# Altium PCB LacewingPXE_v3p1.PcbDoc (part 2 of 2)
Units mm, origin at the board's own origin, x right, y up, seen from the top; angles counter-clockwise.
Board outline 62.74 x 108.59 mm, 2 copper layers (Top Layer, Bottom Layer); 89 components, 71 nets, 448 pads, 65 vias.
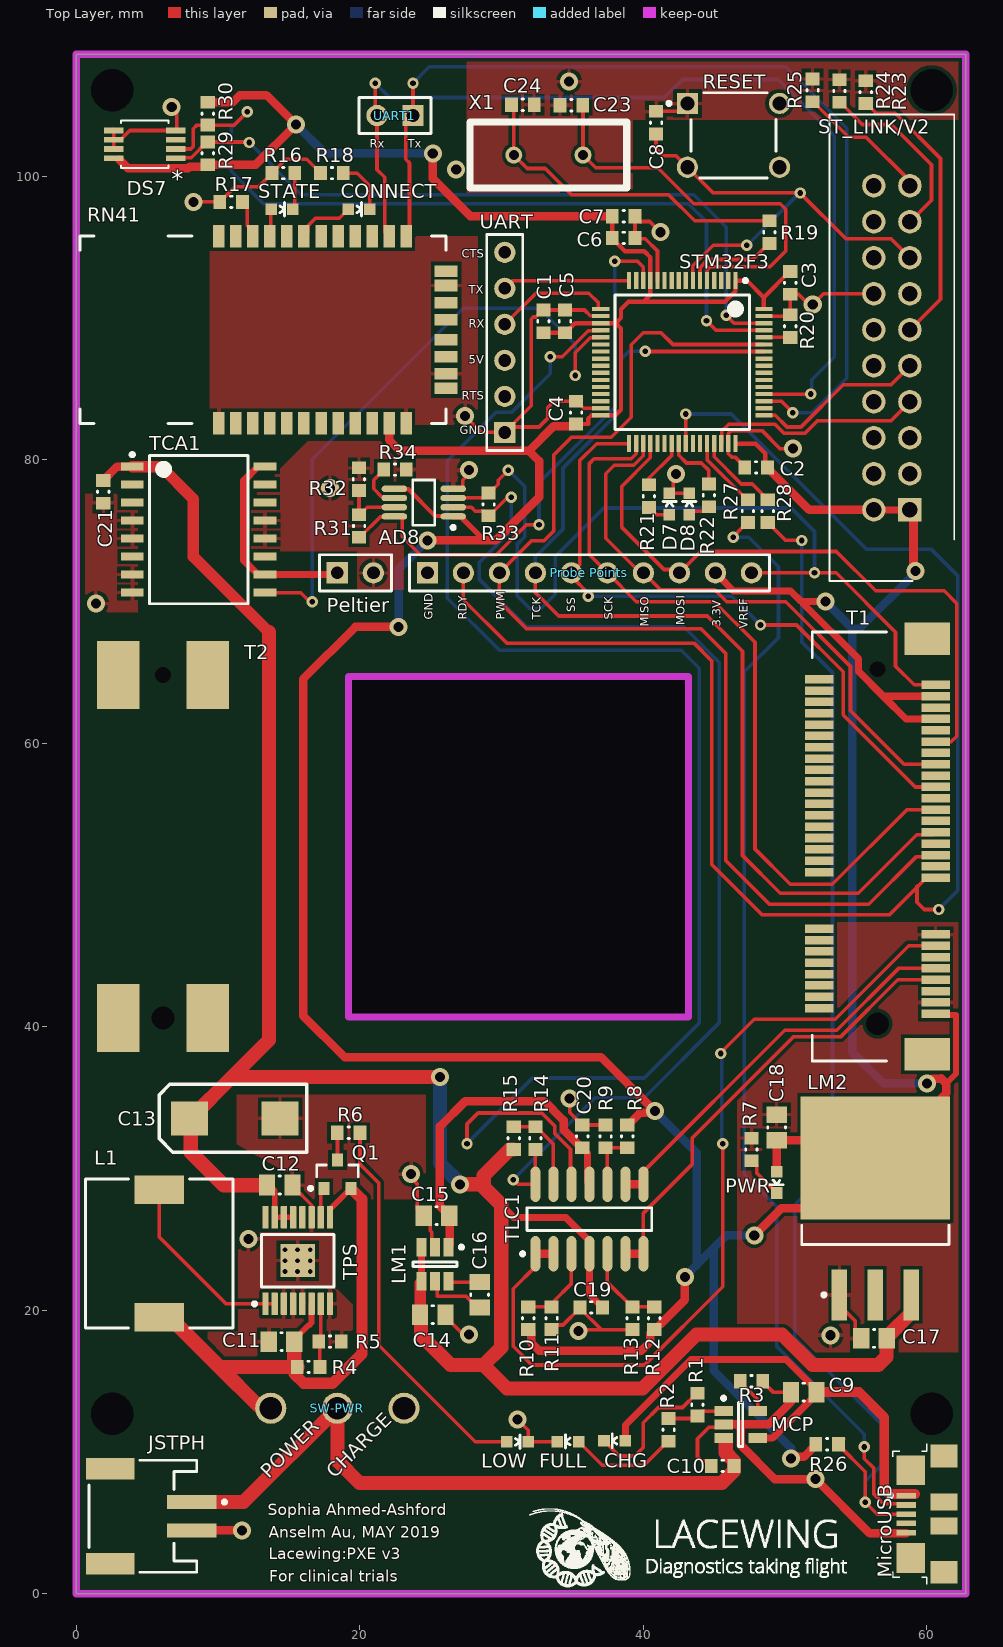
[diagram p0: Top Layer view]

## Polygon pours and split planes (outlines as drawn) (continued)
no net on Top Layer "Top Layer-No Net" (solid, pour order 40): 13.081,78.74
no net on Top Layer "Top Layer-No Net 1" (solid, pour order 30): 11.303,35.179
no net on Top Layer "Top Layer-No Net 2" (solid, pour order 16): 62.738,17.018
no net on Top Layer "Top Layer-No Net 3" (solid, pour order 4): 0,108.585
no net on Top Layer "Top Layer-No Net 4" (solid, pour order 2): -0.127,108.839

## Keep-outs
Keep-Out Layer:
  lines w0.5: 19.188,64.705 19.188,40.672 43.188,40.672 43.188,64.705 19.377,64.705 ; 0,0 62.738,0 62.738,108.585 0,108.585 0,0

## Silkscreen, mask and mechanical layers (free items; w line width, h text height)
Top Overlay:
  drawing of 6186 lines, arcs and shapes, not listed
  text "Tx" at 23.368,101.994 h0.6
  text "Rx" at 20.701,101.981 h0.6
  text "CTS" at 27.178,94.234 h0.6
  text "TX" at 27.686,91.694 h0.6
  text "RX" at 27.686,89.281 h0.6
  text "5V" at 27.686,86.741 h0.6
  text "RTS" at 27.178,84.201 h0.6
  text "GND" at 27.051,81.788 h0.6
  text "SS" at 35.179,69.215 h0.6 r90
  text "GND" at 25.146,68.707 h0.6 r90
  text "RDY" at 27.559,68.704 h0.6 r90
  text "PWM" at 30.226,68.707 h0.6 r90
  text "TCK" at 32.766,68.707 h0.6 r90
  text "SCK" at 37.846,68.707 h0.6 r90
  text "MOSI" at 42.926,68.326 h0.6 r90
  text "MISO" at 40.386,68.199 h0.6 r90
  text "3.3V" at 45.466,68.199 h0.6 r90
  text "VREF" at 47.371,68.072 h0.6 r90
  text "POWER" at 13.578,8.083 h1 r45
  text "CHARGE" at 18.247,8.083 h1 r45
  text "Sophia Ahmed-Ashford" at 13.497,5.532 h0.8
  text "Anselm Au, MAY 2019" at 13.587,3.937 h0.8
  text "Lacewing:PXE v3" at 13.587,2.413 h0.8
  text "For clinical trials" at 13.624,0.833 h0.8

## Text inside footprints (layer, text, board x,y; h text height)
DS7: Top Overlay "*" at 7.582,100.981 h1.27 r180; Mechanical 7 "Default Padstyle: RX54Y16D0T" at 13.716,108.864 h1.27 r180; Mechanical 7 "Pin One Padstyle: RX54Y16D0T" at 13.716,110.388 h1.27 r180; Mechanical 7 "Alt 1 Padstyle: OX60Y90D30P" at 13.399,114.96 h1.27 r180; Mechanical 7 "Alt 2 Padstyle: OX90Y60D30P" at 13.399,116.484 h1.27 r180; Mechanical 7 "0.122in/3.099mm" at 7.207,98.273 h0.64 r180; Mechanical 7 "0.198in/5.029mm" at 7.207,96.368 h0.64 r180; Mechanical 7 "0.122in/3.099mm" at 0.229,102.552 h0.64 r180; Mechanical 7 "0.026in/0.65mm" at 14.503,101.903 h0.64 r180; Mechanical 7 "0.026in/0.66mm" at 9.233,106.832 h0.64 r180; Mechanical 13 "*" at 6.312,102.032 h1.27 r180
MicroUSB: Mechanical 1 "Board edge" at 62.543,11.199 h0.2 r90